# Altium PCB Breakout_layout.PcbDoc
Units mm, origin at the board's own origin, x right, y up, seen from the top; angles counter-clockwise.
Board outline 10.16 x 27.43 mm, 2 copper layers (Top Layer, Bottom Layer); 15 components, 14 nets, 44 pads, 0 vias.
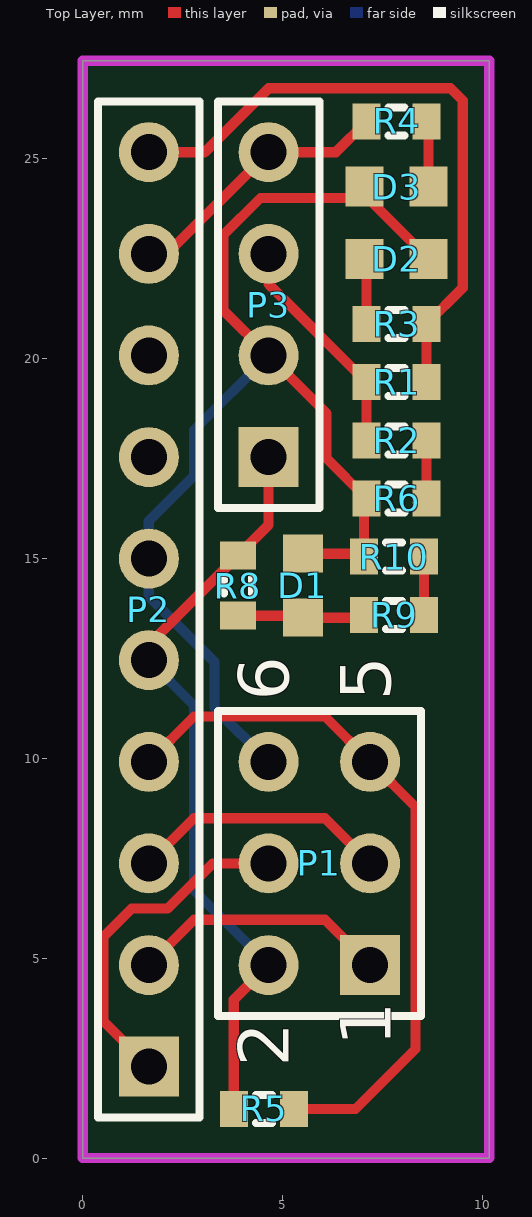
[diagram p0: Top Layer view]
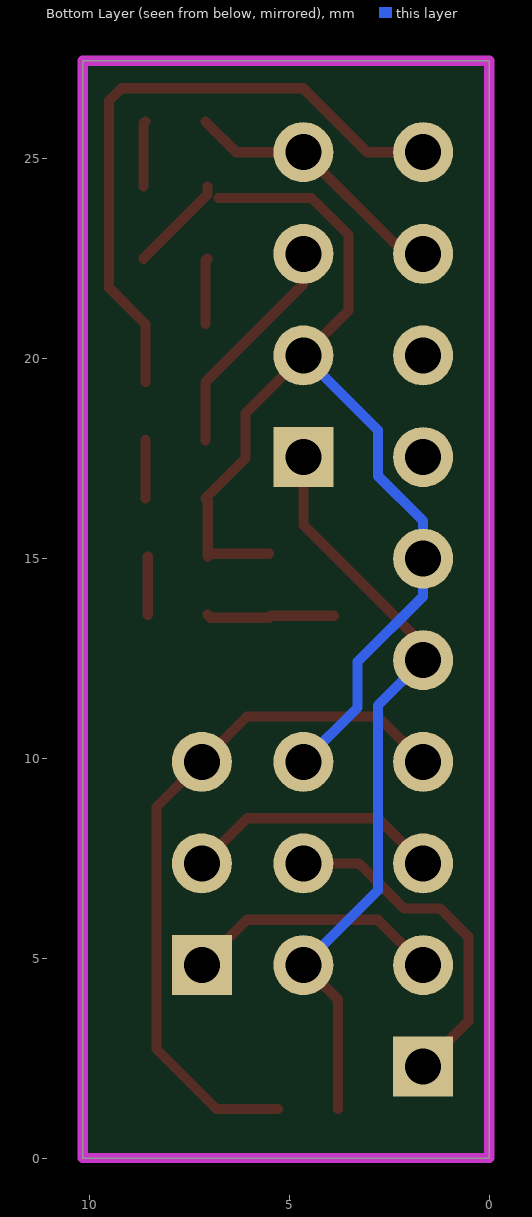
[diagram p1: Bottom Layer view, seen from below]

## Layer stack, top to bottom
Top Solder: solder mask 0.0102, Solder Resist, Dk 3.5
Top Layer: signal copper 0.0356
Dielectric 1: dielectric 0.32, FR-4, Dk 4.8
Bottom Layer: signal copper 0.0356
Bottom Solder: solder mask 0.0102, Solder Resist, Dk 3.5

## Board outline
0,0 0,27.432 10.16,27.432 10.16,0

## Design rules (kind name [scope] priority, off if disabled: settings)
Clearance [All] p1: gap=0.254
PolygonConnect [All] p1: connectstyle=Relief reliefconductorwidth=0.254 reliefentries=4 polygonreliefangle="90 Angle" airgapwidth=0.254
RoomDefinition Breakout_schematic [InComponentClass('Breakout_schematic')] p1: confinementstyle=ConfineIn formatcopy=TRUE lockcomponents=FALSE outline 0,0 10.16,0 10.16,27.432 0,27.432
RoutingVias [All] p1: holewidth=0.711 width=1.27 viastyle="Through Hole" minholewidth=0.711 minwidth=1.27 maxholewidth=0.711 maxwidth=1.27
SolderMaskExpansion [All] p1: expansion=0.102
Width [All] p1: maxlimit=0.254 minlimit=0.254 preferedwidth=0.254
30 further rules are at their usual default settings.

## Components (designator, comment, footprint, x,y, rotation, side; value= is the part's Value field where it differs from the comment)
D1 "LED1" L0603 5.505,14.309 r90 top
D2 "LED1" L0603 7.845,22.482 r0 top
D3 "LED1" L0603 7.845,24.287 r180 top
P1 "Header 3X2" HDR2X3 7.185,4.826 r90 top
P2 "Header 10" HDR1X10 1.651,2.286 r90 top
P3 "Header 4" HDR1X4 4.645,17.526 r90 top
R1 "Res3" J1-0603 7.845,19.399 r180 top
R2 "Res3" J1-0603 7.845,17.945 r0 top
R3 "Res3" J1-0603 7.845,20.853 r0 top
R4 "Res3" J1-0603 7.845,25.916 r180 top
R5 "Res3" J1-0603 4.525,1.229 r180 top
R6 "Res3" J1-0603 7.845,16.49 r180 top
R8 "Res3" J1-0603 3.875,14.309 r270 top
R9 "Res3" J1-0603 7.784,13.582 r0 top
R10 "Res3" J1-0603 7.784,15.036 r180 top

## Footprints (in the part's own frame and the unit in brackets; to place one, negate y for a bottom-side part, rotate by r counter-clockwise, add the part's x,y. Pads: shape width x height; smd on the part's side, far side on the other; paste and mask are expansions set on the pad)
HDR1X4 [mm] "Connector; Header; 4 Position"
  rect 1.5x1.5 hole 0.9: 1(0,0)
  round 1.5 hole 0.9: 2(2.54,0) 3(5.08,0) 4(7.62,0)
  silkscreen extent -1.27,-1.27 8.89,1.27
HDR1X10 [mm] "Connector; Header; 10 Position"
  rect 1.5x1.5 hole 0.9: 1(0,0)
  round 1.5 hole 0.9: 2(2.54,0) 3(5.08,0) 4(7.62,0) 5(10.16,0) 6(12.7,0) 7(15.24,0) 8(17.78,0) 9(20.32,0) 10(22.86,0)
  silkscreen extent -1.27,-1.27 24.13,1.27
HDR2X3 [mm] "Connector; Header; 3x2 Position"
  rect 1.5x1.5 hole 0.9: 1(0,0)
  round 1.5 hole 0.9: 2(0,2.54) 3(2.54,0) 4(2.54,2.54) 5(5.08,0) 6(5.08,2.54)
  silkscreen extent -1.27,-1.27 6.35,3.81
J1-0603 [mm] "Chip Resistor, Body 1.6x0.8mm, IPC High Density"
  rect 0.7x0.9 smd: 1(-0.75,0) 2(0.75,0)
  silkscreen extent -0.2,-0.35 0.2,0.35, body extent -0.85,-0.48 0.85,0.48, height 0.9
L0603 [mm]
  rect 0.95x1 smd: 1(-0.8,0) 2(0.8,0)

## Part data
D1 D2 D3: "Typical RED GaAs LED"
P1: "Header, 3-Pin, Dual row"
P2: "Header, 10-Pin"
P3: "Header, 4-Pin"
R1 R2 R3 R4 R5 R6 R8 R9 R10: "Resistor"

## Nets (pads, with @x,y where several pads share a name; then routed paths per layer and width w, separated by ;. In a path a pad name is that pad's centre, name@x,y a point inside that pad or via, vN(x,y) a via of type N, cw(c..) or ccw(c..) an arc to the next point about the centre after c; other vN are vias at no path point)
GND: D1.2 D2.2 D3.2 P1.6 P2.6 P3.2 R6.2 R10.2 | length 29.8
  Top Layer w0.254: D1.2 6.961,15.109 R10.2 7.034,16.43 R6.2 6.096,17.489 6.096,18.615 P3.2 3.514,21.197 3.514,23.074 4.443,24.003 D3.2@6.761,24.003 ; D3.2 7.045,24.082 D2.2
  Bottom Layer w0.254: P1.6 3.29,11.261 3.29,12.406 1.651,14.045 P2.6 1.651,15.927 2.782,17.058 2.782,18.203 P3.2
MISO: P1.1 P2.2 | length 6.5
  Top Layer w0.254: P2.2 2.782,5.957 6.054,5.957 P1.1
MOSI: P1.4 P2.1 | length 8.6
  Top Layer w0.254: P2.1 0.52,3.417 0.52,5.536 1.219,6.235 2.119,6.235 3.25,7.366 P1.4
NetD2_1: D2.1 R3.1 | length 1.6
  Top Layer w0.254: D2.1 7.095,22.432 R3.1
NetD3_1: D3.1 R4.1 | length 1.6
  Top Layer w0.254: R4.1 8.645,25.866 D3.1
NetR2_2: R2.2 R6.1 | length 1.5
  Top Layer w0.254: R6.1 R2.2
NetR9_2: R9.2 R10.1 | length 1.5
  Top Layer w0.254: R9.2 R10.1
POWER: D1.1 R8.2 R9.1 | length 3.2
  Top Layer w0.254: R8.2 5.455,13.559 D1.1 6.961,13.509 R9.1
RESET: P1.5 P2.4 R5.1 | length 17.8
  Top Layer w0.254: P2.4 2.782,11.037 6.054,11.037 P1.5 8.316,8.775 8.316,2.728 6.817,1.229 R5.1
RXD: P2.9 P3.4 R4.2 | length 6.8
  Top Layer w0.254: P2.9 2.105,22.606 P3.4 6.325,25.146 R4.2
SCK: P1.3 P2.3 | length 6.5
  Top Layer w0.254: P2.3 2.782,8.497 6.054,8.497 P1.3
TXD: P2.10 R1.1 R3.2 | length 16.1
  Top Layer w0.254: P2.10 3.046,25.146 4.647,26.747 9.192,26.747 9.501,26.439 9.501,21.759 R3.2 R1.1
TXD_3.3V: P3.3 R1.2 R2.1 | length 5.7
  Top Layer w0.254: P3.3 4.645,21.848 R1.2 R2.1
VCC: P1.2 P2.5 P3.1 R5.2 R8.1 | length 19.1
  Top Layer w0.254: P2.5 1.651,12.835 R8.1 4.645,15.829 P3.1 ; R5.2 3.775,3.956 P1.2
  Bottom Layer w0.254: P2.5 2.782,11.315 2.782,6.689 P1.2
pads on no net: P2.7 P2.8

## Keep-outs
Keep-Out Layer:
  the board outline again, w0.254

## Text inside footprints (layer, text, board x,y; h text height)
P1: Top Overlay "1" at 7.693,2.794 h1.27 r90; Top Overlay "2" at 5.153,2.286 h1.27 r90; Top Overlay "5" at 7.693,11.43 h1.27 r90; Top Overlay "6" at 5.153,11.43 h1.27 r90